# Altium PCB sensor.PcbDoc
Units mm, origin at the board's own origin, x right, y up, seen from the top; angles counter-clockwise.
Board outline 152.4 x 101.6 mm, 2 copper layers (Top Layer, Bottom Layer); 34 components, 18 nets, 83 pads, 0 vias.
Unrouted connection lines stored in the file: 1.
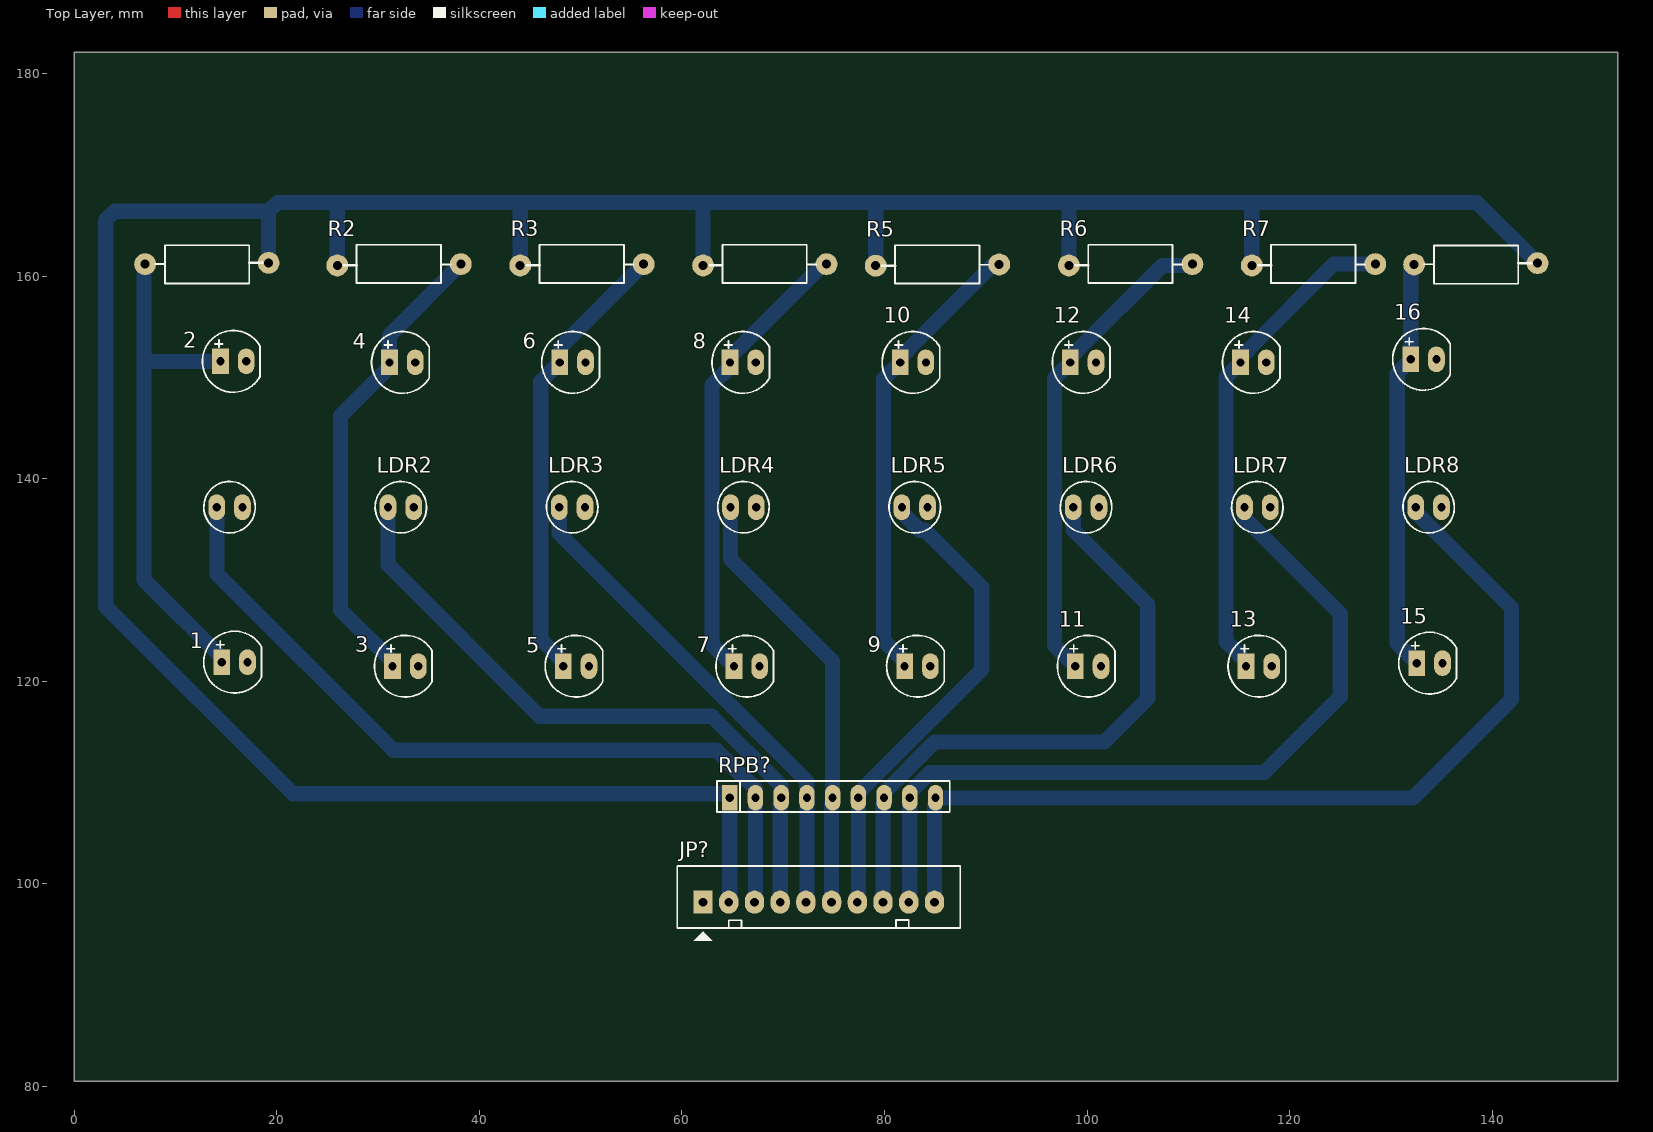
[diagram p0: Top Layer view]
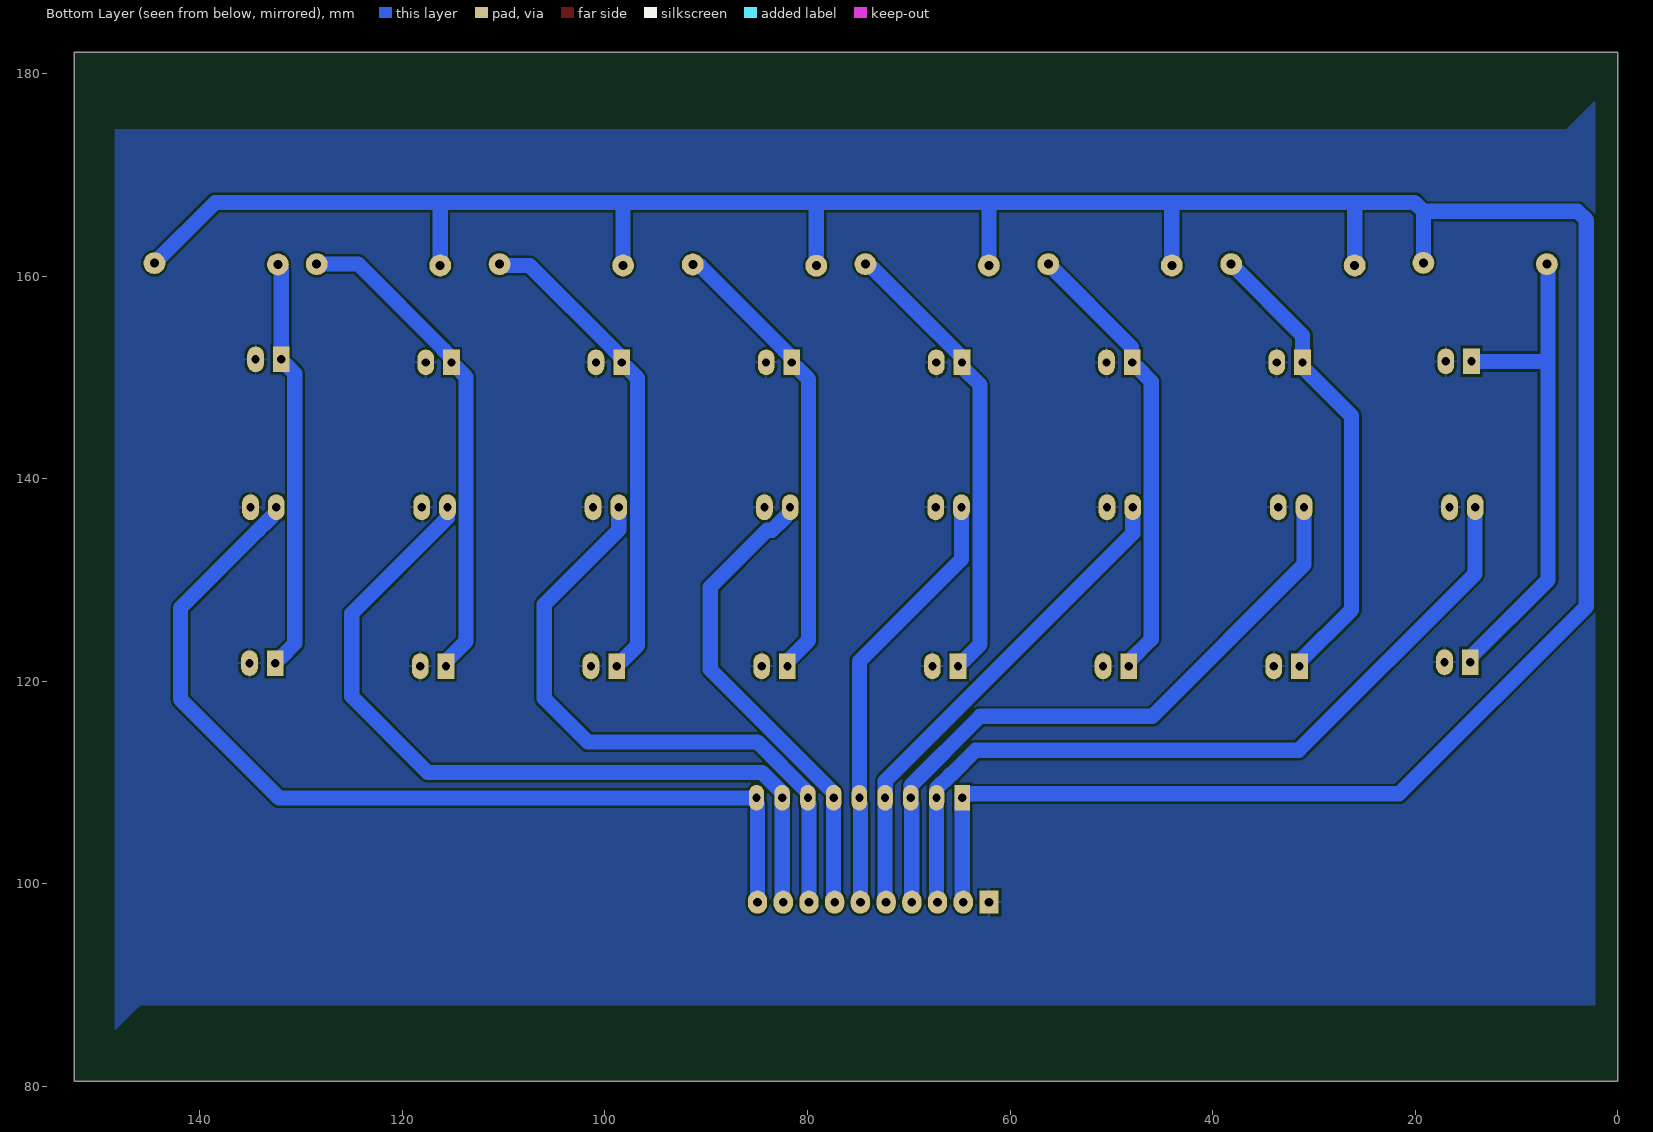
[diagram p1: Bottom Layer view, seen from below]
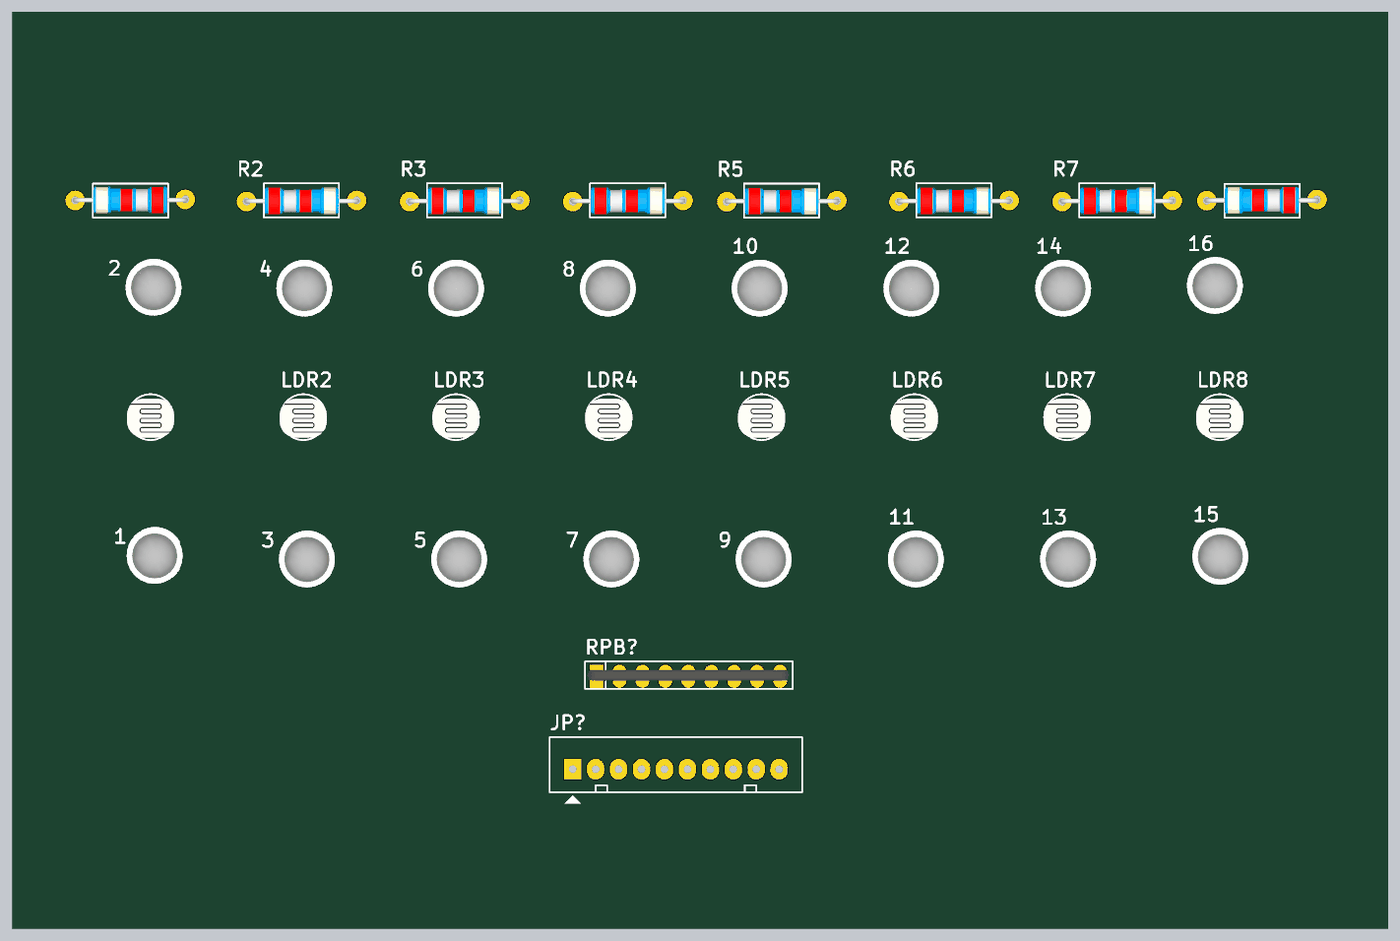
[diagram p2: 3D render of the assembled board from above, using the file's embedded part models]

## Layer stack, top to bottom
Top Solder: solder mask 0.0102, Solder Resist, Dk 3.5
Top Layer: signal copper 0.0356
Dielectric 1: dielectric 0.32, FR-4, Dk 4.8
Bottom Layer: signal copper 0.0356
Bottom Solder: solder mask 0.0102, Solder Resist, Dk 3.5

## Board outline
0,80.518 152.4,80.518 152.4,182.118 0,182.118

## Design rules (kind name [scope] priority, off if disabled: settings)
Clearance [All] p1: gap=0.254 ignorepadtopadclearanceinfootprint=FALSE except(0: Arc-Hole Track-Hole SMDPad-Hole THPad-Hole Via-Hole Fill-Hole Poly-Hole Region-Hole Text-Hole)
PolygonConnect [All] p1: connectstyle=Relief reliefconductorwidth=0.254 reliefentries=4 polygonreliefangle="90 Angle" airgapwidth=0.254
RoutingVias [All] p1: holewidth=0.711 width=1.27 viastyle="Through Hole" minholewidth=0.711 minwidth=1.27 maxholewidth=0.711 maxwidth=1.27
SolderMaskExpansion [All] p1: expansion=0.102 istentingtop=FALSE
Width [All] p1: maxlimit=1.5 minlimit=1.5 preferedwidth=1.5
30 further rules are at their usual default settings.

## Classes and differential pairs
component class sensor: 1 2 3 4 5 6 7 8 9 10 11 12 13 14 16 JP? LDR2 LDR3 LDR4 LDR5 LDR6 LDR7 LDR8 R2 R3 R5 R6 R7 RPB?

## Components (designator, comment, footprint, x,y, rotation, side; value= is the part's Value field where it differs from the comment)
1 "LED" LED-5-WHITE 15.83,121.9 r0 top value="LED 3 ly Single Colour"
2 "LED" LED-5-WHITE 15.7,151.6 r0 top value="LED 3 ly Single Colour"
3 "LED" LED-5-WHITE 32.687,121.5 r0 top value="LED 3 ly Single Colour"
4 "LED" LED-5-WHITE 32.404,151.5 r0 top value="LED 3 ly Single Colour"
5 "LED" LED-5-WHITE 49.544,121.5 r0 top value="LED 3 ly Single Colour"
6 "LED" LED-5-WHITE 49.209,151.5 r0 top value="LED 3 ly Single Colour"
7 "LED" LED-5-WHITE 66.401,121.5 r0 top value="LED 3 ly Single Colour"
8 "LED" LED-5-WHITE 66.013,151.5 r0 top value="LED 3 ly Single Colour"
9 "LED" LED-5-WHITE 83.259,121.5 r0 top value="LED 3 ly Single Colour"
10 "LED" LED-5-WHITE 82.817,151.5 r0 top value="LED 3 ly Single Colour"
11 "LED" LED-5-WHITE 100.116,121.5 r0 top value="LED 3 ly Single Colour"
12 "LED" LED-5-WHITE 99.621,151.5 r0 top value="LED 3 ly Single Colour"
13 "LED" LED-5-WHITE 116.973,121.5 r0 top value="LED 3 ly Single Colour"
14 "LED" LED-5-WHITE 116.426,151.5 r0 top value="LED 3 ly Single Colour"
15 "LED" LED-5-WHITE 133.83,121.8 r0 top value="LED 3 ly Single Colour"
16 "LED" LED-5-WHITE 133.23,151.8 r0 top value="LED 3 ly Single Colour"
JP? "JP10" Header10 62.08,98.2 r0 top value="Connector 10"
LDR1 "LDR" CDS 16.6,137.2 r180 top
LDR2 "LDR" CDS 33.514,137.2 r180 top
LDR3 "LDR" CDS 50.429,137.2 r180 top
LDR4 "LDR" CDS 67.343,137.2 r180 top
LDR5 "LDR" CDS 84.257,137.2 r180 top
LDR6 "LDR" CDS 101.171,137.2 r180 top
LDR7 "LDR" CDS 118.086,137.2 r180 top
LDR8 "LDR" CDS 135,137.2 r180 top
R1 "1" RES-1/2W 13.6,161.2 r180 top
R2 "2" RES-1/2W 31.559,161.2 r0 top
R3 "3" RES-1/2W 49.619,161.2 r0 top
R4 "4" RES-1/2W 67.678,161.2 r0 top
R5 "5" RES-1/2W 84.722,161.17 r0 top
R6 "6" RES-1/2W 103.797,161.2 r0 top
R7 "7" RES-1/2W 121.857,161.2 r0 top
R8 "8" RES-1/2W 138.9,161.17 r180 top
RPB? "10K" RN8 64.72,108.5 r0 top value="Tro thanh 10K"

## Footprints (in the part's own frame and the unit in brackets; to place one, negate y for a bottom-side part, rotate by r counter-clockwise, add the part's x,y. Pads: shape width x height; smd on the part's side, far side on the other; paste and mask are expansions set on the pad)
CDS [mil] "QUANG TRO"
  oval 65x100 hole 32: 1(0,0) 2(100,0)
  silkscreen extent -50,-100 150,100, body extent -53,-80 153,89, height 138
Header10 [mil] "CON10"
  rect 75x90 hole 34: 1(0,0)
  oval 75x90 hole 34: 2(100,0) 3(200,0) 4(300,0) 5(400,0) 6(500,0) 7(600,0) 8(700,0) 9(800,0) 10(900,0)
  silkscreen extent -100,-150 1000,140
LED-5-WHITE [mil] "LED 2 PIN, 5 ly , Only colour, pin to pin 110mil"
  rect 65x100 hole 32: 1(-50,0)
  oval 65x100 hole 32: 2(50,0)
  silkscreen extent -120,-120 104,120, body extent -124,-125 121,120, height 340
RES-1/2W [mil]
  round 85 hole 35: 1(-220,-5) 2(260,0)
  silkscreen extent -195,-74 221,75, body extent -230,-60 270,56, height 121
RN8 [mil] "R SIP8, 9 Pin"
  rect 60x100 hole 32: 1(0,0)
  oval 60x100 hole 32: 2(100,0) 3(200,0) 4(300,0) 5(400,0) 6(500,0) 7(600,0) 8(700,0) 9(800,0)
  silkscreen extent -50,-55 855,65, body extent -43,-20 843,29, height 219

## Part data
1 2 3 4 5 6 7 8 9 10 11 12 13 14 15 16: "LED Single colour Green and Red"
JP?: library part Header10, "Connector 10"
LDR1 LDR2 LDR3 LDR4 LDR5 LDR6 LDR7 LDR8: "Quang Tro"
R1 R2 R3 R4 R5 R6 R7 R8: library part Res, "Res", Manufacturer="Generic Components", Class=Passive, Published=08/06/2000, Publisher="Altium Hobart Technology Centre", SubClass=R
RPB?: library part RN8, "Resistor 8 (Thanh)"

## Nets (pads, with @x,y where several pads share a name; then routed paths per layer and width w, separated by ;. In a path a pad name is that pad's centre, name@x,y a point inside that pad or via, vN(x,y) a via of type N, cw(c..) or ccw(c..) an arc to the next point about the centre after c; other vN are vias at no path point)
+5: JP?.2 R1.1 R2.1 R3.1 R4.1 R5.1 R6.1 R7.1 R8.1 RPB?.1 | length 305.6
  Bottom Layer w1.5: R1.1 19.188,166.421 ; R2.1 25.971,167.229 25.9,167.3 ; R3.1 44.031,167.031 44.3,167.3 ; R4.1 62.09,167.21 62,167.3 ; JP?.2 64.62,98.5 64.72,98.6 RPB?.1 64.72,108.888 64.708,108.9 21.6,108.9 3.1,127.4 3.1,165.543 3.979,166.421 19.188,166.421 ; R5.1 79.134,167.166 79,167.3 ; R6.1 98.209,167.191 98.1,167.3 ; R7.1 116.269,167.231 116.2,167.3 ; R8.1 138.485,167.3 116.2,167.3 ; 19.188,166.421 20.067,167.3 25.9,167.3 ; 25.9,167.3 44.3,167.3 ; 44.3,167.3 62,167.3 ; 62,167.3 79,167.3 ; 79,167.3 98.1,167.3 ; 98.1,167.3 116.2,167.3
GND: 1.2 2.2 3.2 4.2 5.2 6.2 7.2 8.2 9.2 10.2 11.2 12.2 13.2 14.2 15.2 16.2 JP?.1 LDR1.1 LDR2.1 LDR3.1 LDR4.1 LDR5.1 LDR6.1 LDR7.1 LDR8.1
Net1_1: 1.1 2.1 R1.2 | length 50.1
  Bottom Layer w1.5: R1.2 6.896,161.1 6.896,151.6 ; 2.1 6.896,151.6 ; 1.1 14.56,122.345 6.896,130.009 6.896,151.6
Net3_1: 3.1 4.1 R2.2 | length 46.7
  Bottom Layer w1.5: 3.1 31.417,121.945 26.3,127.062 26.3,146.221 31.134,151.055 31.134,154.171 R2.2
Net5_1: 5.1 6.1 R3.2 | length 45.1
  Bottom Layer w1.5: 5.1 48.199,121.575 48.199,122.02 46.059,124.16 46.059,149.62 47.419,150.98 47.863,150.98 47.939,151.055 6.1 48.014,151.575 48.014,152.991 R3.2
Net7_1: 7.1 8.1 R4.2 | length 45.7
  Bottom Layer w1.5: 7.1 65.131,121.945 65.056,122.02 64.611,122.02 62.973,123.658 62.973,149.286 64.743,151.055 8.1 64.818,151.575 64.818,152.067 69.639,156.888 73.622,160.871 73.774,160.871 74.104,161.2 R4.2
Net9_1: 9.1 10.1 R5.2 | length 45.9
  Bottom Layer w1.5: 9.1 81.989,121.945 79.888,124.045 79.888,149.84 81.027,150.98 81.472,150.98 81.547,151.055 81.547,151.944 82.258,152.655 82.258,152.702 90.599,161.044 91.2,161.044 R5.2
Net11_1: 11.1 12.1 R6.2 | length 48.4
  Bottom Layer w1.5: 11.1 98.846,121.945 98.77,122.02 98.326,122.02 96.802,123.544 96.802,149.95 97.831,150.98 98.276,150.98 98.351,151.055 98.351,151.944 99.062,152.655 99.062,152.702 107.434,161.074 110.275,161.074 R6.2
Net13_1: 13.1 14.1 R7.2 | length 49.3
  Bottom Layer w1.5: 13.1 115.703,121.945 113.716,123.931 113.716,150.06 114.636,150.98 115.08,150.98 115.156,151.055 115.156,151.944 115.866,152.655 115.866,152.702 124.364,161.2 R7.2
Net15_1: 15.1 16.1 R8.2 | length 41.3
  Bottom Layer w1.5: R8.2 132.296,160.991 131.96,160.655 131.96,151.355 131.884,151.28 131.509,151.28 130.63,150.401 130.63,123.73 132.04,122.32 132.484,122.32 132.56,122.245 15.1
NetJP?_3: JP?.3 LDR1.2 RPB?.2 | length 78.9
  Bottom Layer w1.5: LDR1.2 14.089,137.171 14.089,130.611 31.5,113.2 63.4,113.2 65.826,110.774 65.898,110.774 RPB?.2@67.255,109.416 ; JP?.3 67.16,98.5 67.26,98.6 RPB?.2
NetJP?_4: JP?.4 LDR2.2 RPB?.3 | length 65.1
  Bottom Layer w1.5: LDR2.2 30.974,131.526 45.946,116.554 62.946,116.554 69.788,109.712 69.788,109.026 69.8,109.014 RPB?.3 69.8,107.986 69.7,107.886 JP?.4
NetJP?_5: JP?.5 LDR3.2 RPB?.4 | length 49.2
  Bottom Layer w1.5: LDR3.2 47.889,134.611 72.328,110.172 72.328,109.026 72.34,109.014 RPB?.4 72.34,98.6 72.24,98.5 JP?.5
NetJP?_6: JP?.6 LDR4.2 RPB?.5 | length 43.2
  Bottom Layer w1.5: LDR4.2 64.803,132.065 74.88,121.988 RPB?.5 74.88,107.986 74.78,107.886 JP?.6
NetJP?_7: JP?.7 LDR5.2 RPB?.6 | length 47.6
  Bottom Layer w1.5: JP?.7 77.32,98.5 77.42,98.6 RPB?.6 77.42,109.008 89.6,121.188 89.6,129.317 83.991,134.926 83.499,134.926 82.428,135.998 82.428,136.004 81.717,136.715 LDR5.2
NetJP?_8: JP?.8 LDR6.2 RPB?.7 | length 62.7
  Bottom Layer w1.5: JP?.8 79.86,107.886 79.96,107.986 RPB?.7 79.96,109.008 84.952,114 101.7,114 106,118.3 106,127.6 98.631,134.969 LDR6.2
NetJP?_9: JP?.9 LDR7.2 RPB?.8 | length 79.9
  Bottom Layer w1.5: JP?.9 82.4,98.5 82.5,98.6 RPB?.8 82.508,108.508 82.508,109.016 84.492,111 117.5,111 125,118.5 125,126.7 115.575,136.125 115.575,137.171 LDR7.2
NetJP?_10: JP?.10 LDR8.2 RPB?.9 | length 94.1
  Bottom Layer w1.5: JP?.10 84.94,107.886 85.04,107.986 RPB?.9 132.2,108.5 141.9,118.2 141.9,127.268 134.242,134.926 133.17,135.998 133.17,136.004 132.46,136.715 LDR8.2

## Polygon pours and split planes (outlines as drawn)
GND on Bottom Layer "GND_L02_P000" (solid, pour order 0): 2.2,177.4 5.1,174.5 148.4,174.5 148.4,85.5 145.9,88 2.2,88